# Altium PCB PCB uC Slave Switch.PcbDoc
Units mm, origin at the board's own origin, x right, y up, seen from the top; angles counter-clockwise.
Board outline 88.6 x 48.6 mm, 2 copper layers (Top Layer, Bottom Layer), stack 1.671 mm thick; 26 components, 42 nets, 154 pads, 15 vias.
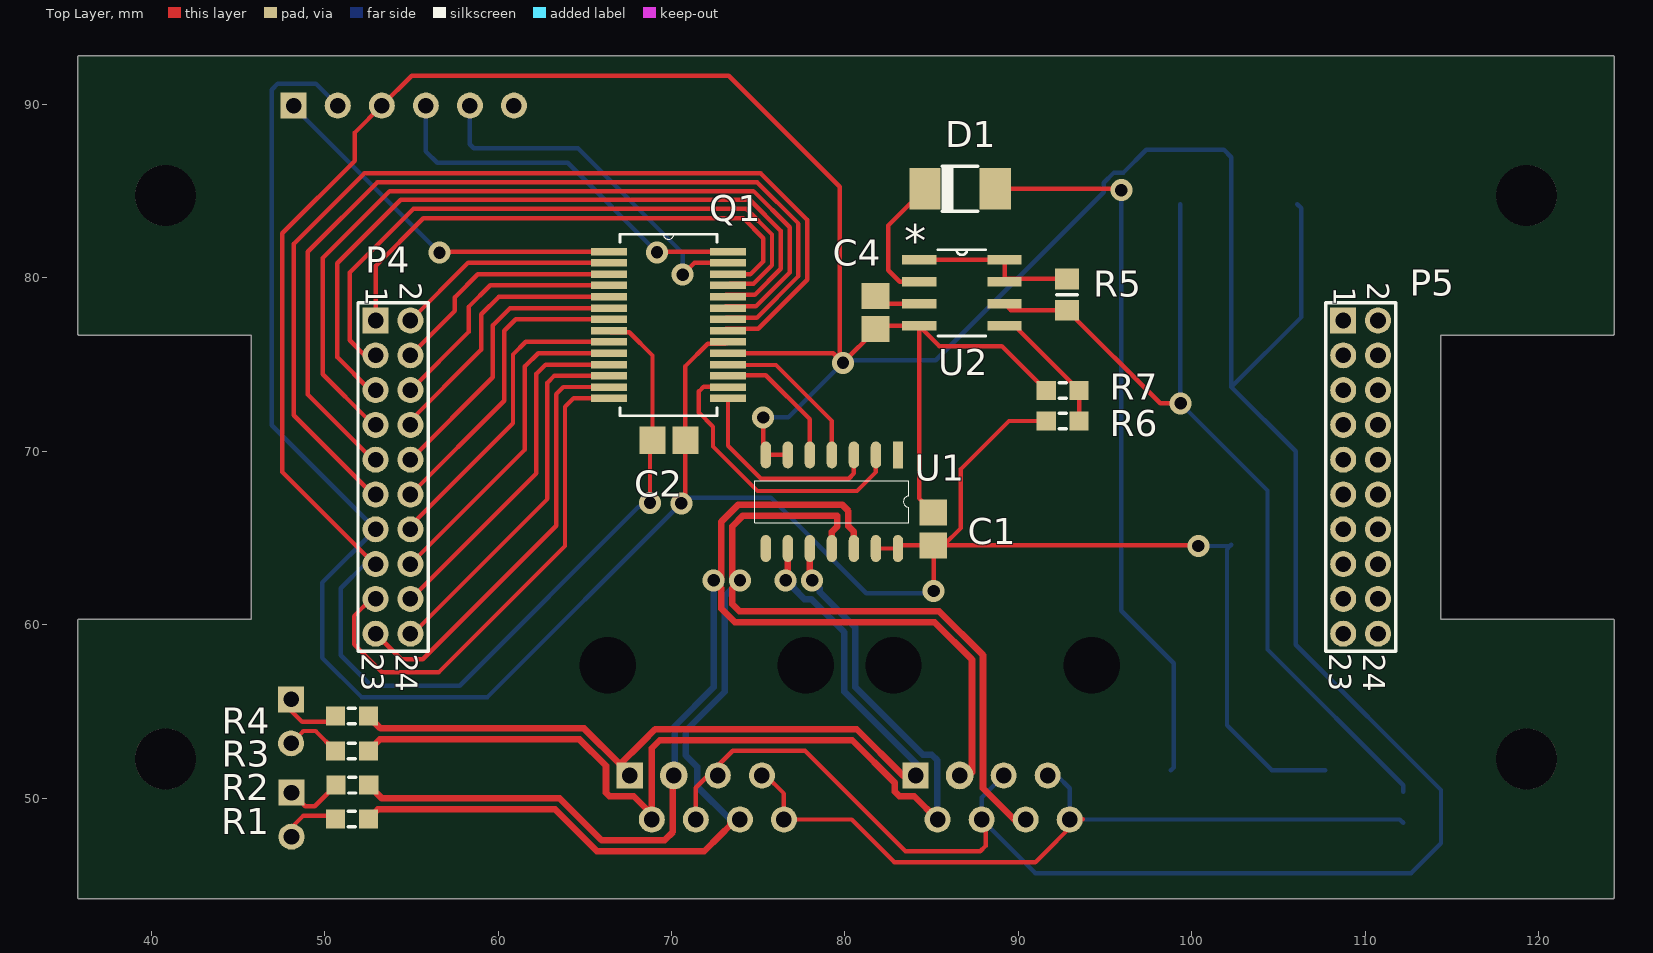
[diagram p0: Top Layer view]
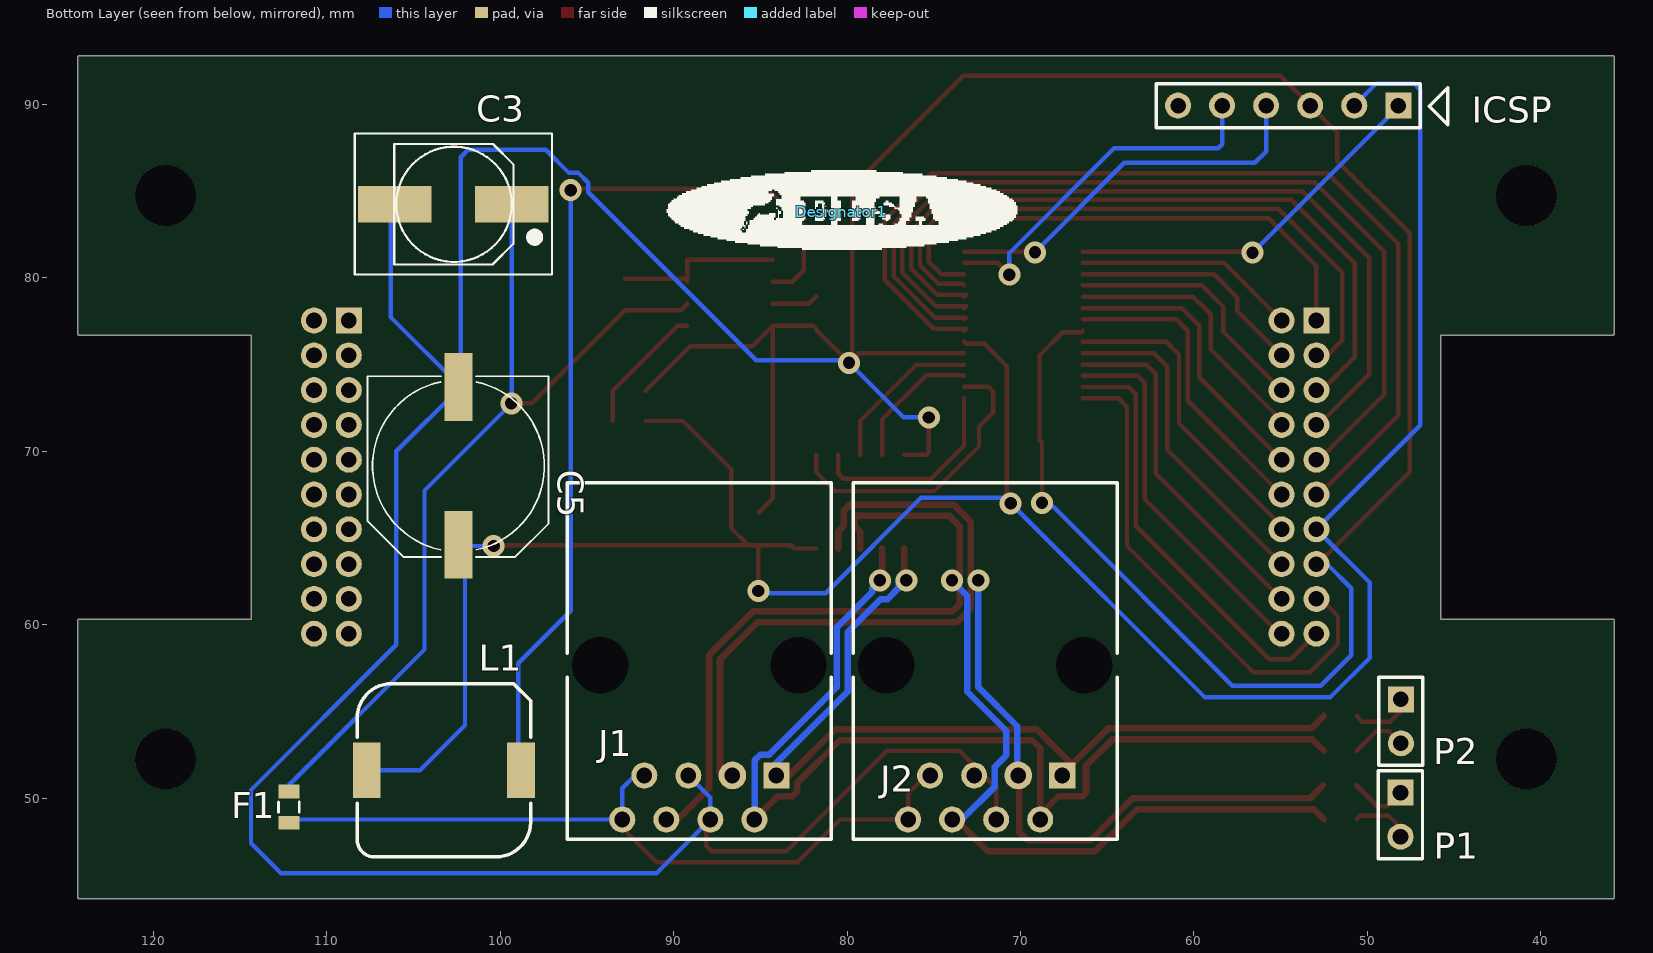
[diagram p1: Bottom Layer view, seen from below]
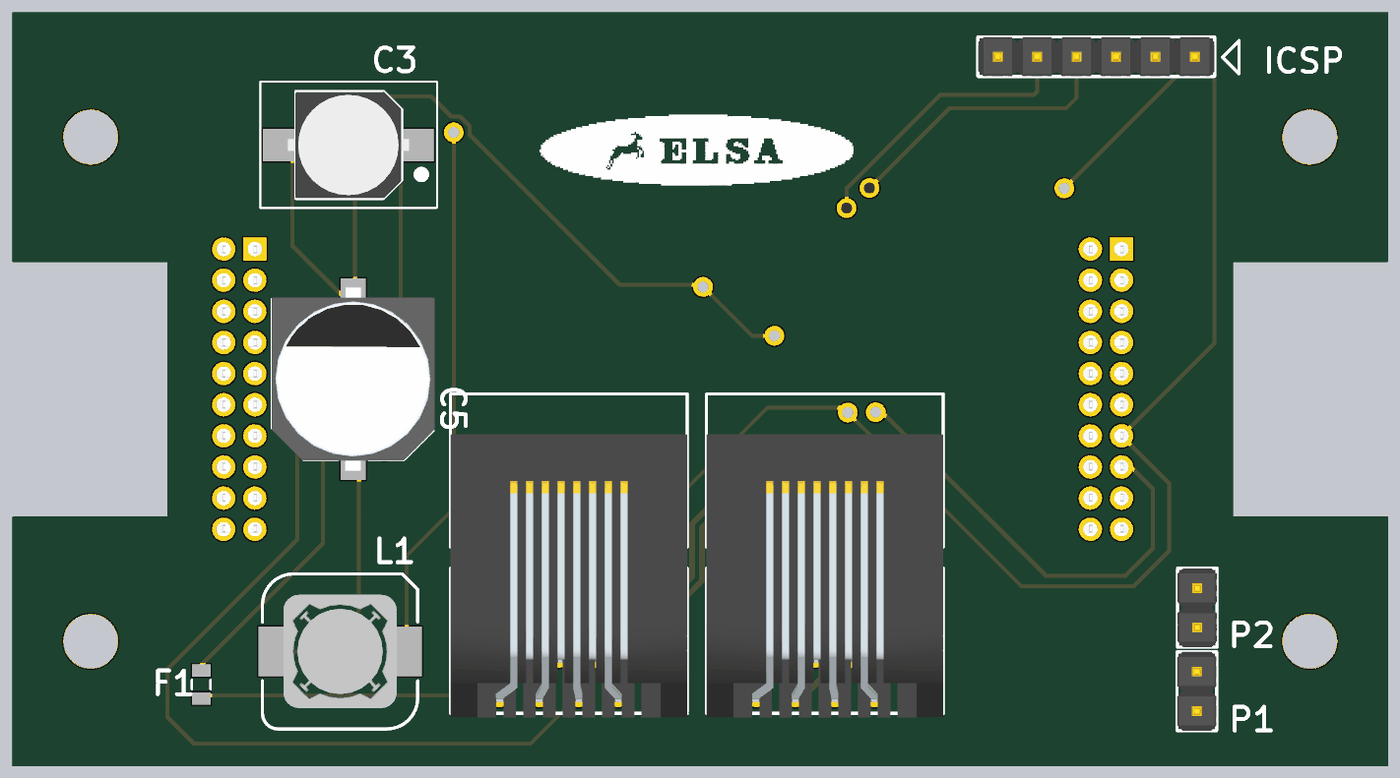
[diagram p2: 3D render of the assembled board from below, using the file's embedded part models]

## Layer stack, top to bottom
Top Solder: solder mask 0.0102, Solder Resist, Dk 3.5
Top Layer: signal copper 0.0356
Dielectric 1: dielectric 1.6, FR-4, Dk 4.8
Bottom Layer: signal copper 0.0356
Bottom Solder: solder mask 0.0102, Solder Resist, Dk 3.5

## Board outline
35.775,44.225 cw(c35.811,44.261) 35.76,44.261 35.76,60.259 cw(c35.811,60.261) 35.811,60.311 45.76,60.311 45.76,76.71 35.811,76.71 cw(c35.811,76.761) 35.76,76.761 35.76,92.761 cw(c35.811,92.761) 35.811,92.811 124.311,92.811 cw(c124.311,92.761) 124.361,92.761 124.361,76.761 cw(c124.311,76.761) 124.311,76.71 114.361,76.71 114.361,60.311 124.311,60.311 cw(c124.311,60.261) 124.346,60.296 cw(c124.311,60.261) 124.361,60.261 124.361,44.261 cw(c124.311,44.261) 124.311,44.21 35.811,44.21 cw(c35.811,44.261)

## Design rules (kind name [scope] priority, off if disabled: settings)
Clearance Clearance_1 [InComponent('Q1')] p1: gap=0.2
Clearance [All] p2: gap=0.254
DiffPairsRouting [All] p1: maxlimit=0.254 minlimit=0.254 mostfreqgap=0.254 toplayer_minwidth=0.381 toplayer_maxwidth=0.381 toplayer_prefwidth=0.381 bottomlayer_minwidth=0.381 bottomlayer_maxwidth=0.381 bottomlayer_prefwidth=0.381 maxuncoupledlength=12.7
PolygonConnect [All] p1: connectstyle=Relief reliefconductorwidth=0.254 reliefentries=4 polygonreliefangle="90 Angle" airgapwidth=0.254
RoutingVias [All] p1: holewidth=0.711 width=1.27 viastyle="Through Hole" minholewidth=0.711 minwidth=1.27 maxholewidth=0.711 maxwidth=1.27
SolderMaskExpansion [All] p1: expansion=0.102
Width [All] p1: maxlimit=0.254 minlimit=0.254 preferedwidth=0.254
29 further rules are at their usual default settings.

## Classes and differential pairs
differential pair TX: +TX_P -TX_N
differential pair RX: +RX_P -RX_N

## Components (designator, comment, footprint, x,y, rotation, side; value= is the part's Value field where it differs from the comment)
C1 "Cap Semi" CAPC2012M 85.09,65.532 r270 top
C2 "Cap Semi" CAPC2012M 69.85,70.637 r0 top
C3 "EDK107M050A9MAA" CAPAE830X1020N 102.718,84.252 r0 bottom
C4 "Cap Pol3" CAPC2012M 81.763,78.003 r270 top
C5 "EDK107M050A9MAA" CAPAE1030X1200_EEE-FC1C471AP(PRIMARY) 102.413,69.164 r270 bottom
D1 "IN5819" DO-214AC_SS14(Primary) 86.639,85.141 r0 top
Designator1 "Comment" ElsaLogoTop 80.34,83.82 r180 bottom
F1 "resettable fuse 1.1A" 0805 112.192,49.479 r270 bottom
ICSP "ICSP Header" HDR1X6 48.209,89.941 r0 bottom (schematic designator P3)
J1 "15-43-6233" 15-43-6233 88.519,68.199 r0 bottom locked
J2 "15-43-6233" 15-43-6233 72.034,68.199 r0 bottom locked
L1 "220uH" CDRH104R 103.251,51.613 r270 bottom
P1 "Header 2" HDR1X2 48.082,50.317 r270 bottom
P2 "Header 2" HDR1X2 48.057,55.702 r270 bottom
P4 "Header 10x2" "HDR2X10 pitch 2mm hole" 52.934,77.546 r270 top
P5 "Header 10x2" "HDR2X10 pitch 2mm hole" 108.737,77.546 r270 top
Q1 "PIC16F18855" SOP65P780X200-28N 69.825,77.292 r0 top
R1 "Res1" RESC1608M 51.562,48.793 r0 top
R2 "Res1" RESC1608M 51.587,50.749 r0 top
R3 "Res1" RESC1608M 51.562,52.73 r0 top
R4 "Res1" RESC1608M 51.562,54.737 r0 top
R5 "Res1" 6-0805_N 92.812,79.045 r270 top
R6 "Res1" RESC1608M 92.558,71.755 r180 top
R7 "Res1" RESC1608M 92.558,73.508 r0 top
U1 "SN65HVD1792D" R-PDSO-G14 83.058,69.799 r270 top
U2 "MC34063ADG" SOIC127P600X175-8N 86.741,79.146 r0 top

## Footprints (in the part's own frame and the unit in brackets; to place one, negate y for a bottom-side part, rotate by r counter-clockwise, add the part's x,y. Pads: shape width x height; smd on the part's side, far side on the other; paste and mask are expansions set on the pad)
6-0805_N [mm] "Chip Resistor, Body 2.0x1.2mm, IPC Medium Density"
  rect 1.2x1.4 smd: 1(-0.9,0) 2(0.9,0)
  silkscreen extent 0,-0.6 0,0.6, body extent -1.07,-0.7 1.07,0.7, height 0.7
15-43-6233 [mm] "Connector; PCB Jack, Thru-Hole; 1-Port; Unshielded without Lightpipes; Right Angle"
  rect 1.5x1.5 hole 0.9: 1(-4.445,16.89)
  round 1.5 hole 0.9: 2(-3.175,19.43) 4(-0.635,19.43) 5(0.635,16.89) 6(1.905,19.43) 7(3.175,16.89) 8(4.445,19.43)
  round 1.6 hole 0.9: 3(-1.905,16.89)
  round 2.95 hole 3.25 unplated: MH1(-5.715,10.54) MH2(5.715,10.54)
  silkscreen extent -7.62,0 7.62,20.58, body extent -7.62,2.59 7.62,20.85, height 12.65
0805 [mm]
  rect 0.8x1.2 smd: 1(-0.9,0) 2(0.9,0)
  silkscreen extent -0.3,-0.6 0.3,0.6
CAPAE830X1020N [mm]
  rect 4.25x2.1 smd: NEG(3.375,0) POS(-3.375,0)
  silkscreen extent -5.7,-4.08 5.68,4.05, body extent -3.9,-3.4 3.9,3.4, height 8.05
CAPAE1030X1200_EEE-FC1C471AP(PRIMARY) [mm]
  rect 3.9x1.6 smd: NEG(-4.55,0) POS(4.55,0)
  silkscreen extent -5.18,-5.25 5.25,5.2, body extent -5.9,-5.25 5.9,5.25, height 10.5
CAPC2012M [mm] "Chip Capacitor, Body 2.0x1.3mm, IPC Low Density"
  rect 1.5x1.6 smd: 1(-0.95,0) 2(0.95,0)
  body extent -1.1,-0.72 1.1,0.72, height 1.1
CDRH104R [mm]
  rect 3.2x1.6 smd: 1(0,4.45) 2(0,-4.45)
  silkscreen extent -5,-5 5,5, body extent -3.65,-3.65 3.65,3.65
DO-214AC_SS14(Primary) [mm]
  rect 1.8x2.4 smd: A(2.025,0) C(-2.025,0)
  silkscreen extent -1.07,-1.3 1.02,1.3, body extent -2.74,-1.4 2.74,1.4, height 2.26
ElsaLogoTop [mm] "Elsa Company logo @ Top Overlay"
  silkscreen extent -10.07,-2.19 10.17,2.39
HDR1X2 [mm] "Connector; Header; 2 Position"
  rect 1.5x1.5 hole 0.9: 1(0,0)
  round 1.5 hole 0.9: 2(2.54,0)
  silkscreen extent -1.27,-1.27 3.81,1.27, body extent -1.27,-1.27 3.81,1.27, height 9.5
HDR1X6 [mm] "Connector; Header; 6 Position"
  rect 1.5x1.5 hole 0.9: 1(0,0)
  round 1.5 hole 0.9: 2(2.54,0) 3(5.08,0) 4(7.62,0) 5(10.16,0) 6(12.7,0)
  silkscreen extent -1.27,-1.27 13.97,1.27, body extent -1.27,-1.27 13.97,1.27, height 9.5
"HDR2X10 pitch 2mm hole" [mm] "Connector; Header; 14x2 Position"
  rect 1.5x1.5 hole 0.9: 1(0,0)
  round 1.5 hole 0.9: 2(0,2.007) 3(2.007,0) 4(2.007,2.007) 5(4.013,0) 6(4.013,2.007) 7(6.02,0) 8(6.02,2.007) 9(8.026,0) 10(8.026,2.007) 11(10.033,0) 12(10.033,2.007) 13(12.04,0) 14(12.04,2.007) 15(14.046,0) 16(14.046,2.007) 17(16.053,0) 18(16.053,2.007) 19(18.059,0) 20(18.059,2.007)
  silkscreen extent -1.02,-1.02 19.08,3.02, body extent -1.22,-1.25 19.28,3.25, height 4
R-PDSO-G14 [mm]
  rect 1.55x0.6 smd: 1(0,0)
  oval 1.55x0.6 smd: 2(0,-1.27) 3(0,-2.54) 4(0,-3.81) 5(0,-5.08) 6(0,-6.35) 7(0,-7.62) 8(5.4,-7.62) 9(5.4,-6.35) 10(5.4,-5.08) 11(5.4,-3.81) 12(5.4,-2.54) 13(5.4,-1.27) 14(5.4,0)
  silkscreen extent 1.48,-8.25 3.92,0.64, body extent -0.27,-8.17 5.73,0.58, height 1.75
RESC1608M [mm] "Chip Resistor, Body 1.6x0.8mm, IPC Low Density"
  rect 1.1x1.1 smd: 1(-0.95,0) 2(0.95,0)
  silkscreen extent -0.2,-0.45 0.2,0.45, body extent -0.85,-0.48 0.85,0.48, height 0.6
SOIC127P600X175-8N [mil]
  rect 78x22 smd: 1(-97,75) 2(-97,25) 3(-97,-25) 4(-97,-75) 5(97,-75) 6(97,-25) 7(97,25) 8(97,75)
  silkscreen extent -54,-98 54,98, body extent -122,-98 122,98, height 69
SOP65P780X200-28N [mil]
  rect 81x17 smd: 1(-135,166) 2(-135,141) 3(-135,115) 4(-135,90) 5(-135,64) 6(-135,38) 7(-135,13) 8(-135,-13) 9(-135,-38) 10(-135,-64) 11(-135,-90) 12(-135,-115) 13(-135,-141) 14(-135,-166) 15(135,-166) 16(135,-141) 17(135,-115) 18(135,-90) 19(135,-64) 20(135,-38) 21(135,-13) 22(135,13) 23(135,38) 24(135,64) 25(135,90) 26(135,115) 27(135,141) 28(135,166)
  silkscreen extent -110,-206 110,207, body extent -154,-201 154,201, height 75

## Part data
C1 C2: "Capacitor (Semiconductor SIM Model)"
C3 C5: "Cap, Alu Elec, 100uf, 50v, Smd"
C4: "Polarized Capacitor (Surface Mount)"
D1: library part SS14, "1a 40v Smd Schottky Rectifier"
F1: library part "resettable fuse 1.1A 0805", "resettable fuse 1.1A 0805"
ICSP: library part "Header 6", "Header, 6-Pin"
J1 J2: "Right Angle, Standard Profile, RJ45-Keyed, Flange Mount PCB Jack"
L1: library part CDRH104R, "Inductor Power Shielded Drum Core 220uH"
P1 P2: "Header, 2-Pin"
P4 P5: "Header, 14-Pin, Dual row"
Q1: "PIC16F18855-SSOP 28 pin"
R1 R2 R3 R4 R5 R6 R7: "Resistor"
U2: "MC34063A Series 40V 1.5A 100kHz Step-Up/Down/Inverting Switching Regulator-SOIC8"

## Free pads (board coordinates)
  round 3.5 hole 3.5: 0(40.811,52.261) 0(40.811,84.761) 0(119.311,52.261) 0(119.311,84.761)

## Via types
v1: diameter 1.27, hole 0.711, Top Layer to Bottom Layer, 15 vias

## Nets (pads, with @x,y where several pads share a name; then routed paths per layer and width w, separated by ;. In a path a pad name is that pad's centre, name@x,y a point inside that pad or via, vN(x,y) a via of type N, cw(c..) or ccw(c..) an arc to the next point about the centre after c; other vN are vias at no path point)
DE: Q1.18 U1.4 | length 9.3
  Top Layer w0.254: Q1.18 73.279,74.981 76.022,74.981 79.248,71.755 U1.4
GND: C1.1 C2.1 C3.NEG C4.2 C5.NEG ICSP.3 J1.4 J1.5 J2.4 J2.5 P4.15 Q1.8 Q1.19 R7.1 U1.6 U1.7 U2.4 | length 294.7
  Top Layer w0.254: P4.15@52.857,63.5 47.549,68.809 47.549,82.575 51.74,86.766 51.74,88.392 ICSP.3 55.016,91.669 73.304,91.669 79.705,85.268 79.705,75.286 v1(79.883,75.108) 79.324,75.667 Q1.19 ; Q1.8 66.488,76.87 67.56,76.87 68.9,75.53 C2.1 68.758,70.495 v1(68.758,67.031) ; J2.4@70.841,48.769 71.399,49.328 71.399,50.598 73.532,52.73 77.699,52.73 83.49,46.939 87.808,46.939 88.113,47.244 88.113,48.464 J1.4@88.417,48.769 ; v1(75.286,71.958) 75.286,69.952 U1.7 U1.6 ; v1@79.908,75.133 81.763,76.987 C4.2 81.951,77.241 U2.4 ; C1.1 84.277,67.295 U2.4 ; R7.1 89.042,76.073 85.446,76.073 U2.4
  Bottom Layer w0.254: P4.15 52.324,63.5 50.927,62.103 50.927,58.242 52.68,56.49 57.785,56.49 68.11,66.815 v1@68.974,66.815 ; v1@68.605,66.878 v1(68.758,67.031) ; v1(75.286,71.958) 76.733,71.958 v1(79.883,75.108) 80.035,75.26 85.242,75.26 94.92,84.938 94.92,85.485 95.515,86.081 96.063,86.081 97.384,87.401 101.854,87.401 102.286,86.97 C5.NEG@102.286,73.714 ; J1.5@89.687,51.309 J1.5 87.884,50.039 J1.4 90.984,45.669 112.649,45.669 114.376,47.396 114.376,50.47 105.994,58.852 105.994,70.006 C5.NEG@102.286,73.714 ; C3.NEG 106.324,84.02 106.324,77.753 C5.NEG@102.286,73.714
ICSPCLK: ICSP.5 Q1.27 | length 21.3
  Top Layer w0.254: v1(70.637,80.188) 71.323,80.874 Q1.27
  Bottom Layer w0.254: ICSP.5 58.369,87.706 58.598,87.478 64.607,87.478 70.637,81.447 v1(70.637,80.188)
ICSPDAT: ICSP.4 Q1.28 | length 22.5
  Top Layer w0.254: v1(69.164,81.483) 69.19,81.509 Q1.28
  Bottom Layer w0.254: ICSP.4 55.829,87.3 56.49,86.639 64.008,86.639 v1(69.164,81.483)
M\C\L\R\: ICSP.1 Q1.1 | length 22
  Top Layer w0.254: v1(56.617,81.458) 56.667,81.509 Q1.1
  Bottom Layer w0.254: ICSP.1 48.082,89.814 48.26,89.814 v1(56.617,81.458)
NetC4_1: C4.1 U2.3 | length 2.7
  Top Layer w0.254: C4.1 82.205,78.511 U2.3
NetD1_A: D1.A L1.1 | length 42.1
  Top Layer w0.254: D1.A 95.86,85.141 v1(95.936,85.065)
  Bottom Layer w0.254: v1(95.936,85.065) 95.936,60.808 98.958,57.785 98.958,51.77 L1.1
NetD1_C: D1.C U2.2 | length 7.6
  Top Layer w0.254: U2.2 83.16,79.781 82.499,80.442 82.499,83.026 D1.C
NetF1_2: F1.2 J1.7 J1.8 J2.7 J2.8 | length 45.2
  Top Layer w0.254: J2.7@74.651,51.309 75.437,51.309 76.479,50.267 J2.8 80.39,48.769 82.855,46.304 90.983,46.304 93.472,48.793 93.726,48.793
  Bottom Layer w0.254: J1.7@92.227,51.309 92.964,50.572 J1.8 112.002,48.769 F1.2
NetP1_1: P1.1 R2.1 | length 3.4
  Top Layer w0.254: P1.1 48.87,49.53 49.418,49.53 R2.1
NetP1_2: P1.2 R1.1 | length 3.4
  Top Layer w0.254: P1.2 48.082,48.311 48.768,48.997 50.409,48.997 R1.1
NetP2_1: P2.1 R4.1 | length 3.6
  Top Layer w0.254: P2.1 48.057,55.042 48.692,54.407 50.282,54.407 R4.1
NetP2_2: P2.2 R3.1 | length 3.3
  Top Layer w0.254: P2.2 48.768,53.873 49.469,53.873 R3.1
NetR5_1: R5.1 U2.1 U2.7 U2.8 | length 9.9
  Top Layer w0.254: U2.1 U2.8 U2.7 89.368,79.945 R5.1
NetR6_1: R6.1 R7.2 U2.5 | length 7.6
  Top Layer w0.254: U2.5 89.774,77.241 R7.2 R6.1
RA0: P4.2 Q1.2 | length 12.8
  Top Layer w0.254: P4.2 58.268,80.874 Q1.2
RA1: P4.4 Q1.3 | length 13.9
  Top Layer w0.254: P4.4 57.506,78.105 57.506,78.892 58.826,80.213 Q1.3
RA2: P4.6 Q1.4 | length 14.8
  Top Layer w0.254: P4.6 58.293,76.886 58.293,78.334 59.538,79.578 Q1.4
RA3: P4.8 Q1.5 | length 16
  Top Layer w0.254: P4.8@54.686,71.526 59.03,75.87 59.03,77.902 60.046,78.918 Q1.5
RA4: P4.10 Q1.6 | length 16.8
  Top Layer w0.254: P4.10 59.69,74.27 59.69,77.267 60.681,78.257 Q1.6
RA5: P4.12 Q1.7 | length 18
  Top Layer w0.254: P4.12 60.35,72.923 60.35,76.962 61.011,77.622 Q1.7
RA6: P4.16 Q1.10 | length 19.3
  Top Layer w0.254: P4.16 61.544,70.104 61.544,74.905 62.306,75.667 Q1.10
RA7: P4.14 Q1.9 | length 18.4
  Top Layer w0.254: P4.14 54.94,65.71 60.858,71.628 60.858,75.59 61.595,76.327 Q1.9
RB0: P4.11 Q1.21 | length 58.3
  Top Layer w0.254: P4.11@52.934,67.793 52.502,67.793 48.209,72.085 48.209,81.966 52.273,86.03 75.144,86.03 77.826,83.348 77.826,79.898 75.007,77.08 73.136,77.08 Q1.21
RB1: P4.9 Q1.22 | length 52.9
  Top Layer w0.254: P4.9@52.934,69.647 52.654,69.647 49.022,73.279 49.022,81.509 53.035,85.522 74.933,85.522 77.318,83.138 77.318,80.108 74.924,77.715 73.161,77.715 Q1.22
RB2: P4.7 Q1.23 | length 47.5
  Top Layer w0.254: P4.7@52.934,71.78 52.553,71.78 49.886,74.447 49.886,81.153 53.746,85.014 74.723,85.014 76.81,82.927 76.81,80.319 74.866,78.375 73.136,78.375 Q1.23
RB3: P4.5 Q1.24 | length 42.4
  Top Layer w0.254: P4.5 52.629,73.533 50.724,75.438 50.724,80.848 54.381,84.506 74.513,84.506 76.302,82.717 76.302,80.529 74.808,79.035 73.136,79.035 Q1.24
RB4: P4.3 Q1.25 | length 37.4
  Top Layer w0.254: P4.3@53.238,75.54 52.299,75.54 51.435,76.403 51.435,80.315 55.118,83.998 74.302,83.998 75.794,82.506 75.794,80.739 74.725,79.67 73.346,79.67 Q1.25
RB5: P4.1 Q1.26 | length 30.8
  Top Layer w0.254: P4.1 52.934,80.696 55.677,83.439 74.143,83.439 75.286,82.296 75.286,80.95 74.549,80.213 Q1.26
RC0: P4.18 Q1.11 | length 20.4
  Top Layer w0.254: P4.18@54.94,61.468 62.205,68.732 62.205,74.473 62.738,75.006 Q1.11
RC1: P4.20 Q1.12 | length 21.6
  Top Layer w0.254: P4.20@54.94,59.36 62.84,67.259 62.84,73.965 63.246,74.371 Q1.12
RC2: P4.19 Q1.13 | length 25
  Top Layer w0.254: P4.19 54.407,58.014 55.651,58.014 63.348,65.71 63.348,73.304 63.754,73.711 Q1.13
RC3: P4.17 Q1.14 | length 29.9
  Top Layer w0.254: P4.17 52.68,61.493 51.689,60.503 51.689,58.877 53.315,57.252 56.566,57.252 63.856,64.541 63.856,72.568 64.364,73.076 Q1.14
RE: Q1.15 U1.3 | length 12
  Top Layer w0.254: Q1.15 73.254,70.333 75.159,68.428 80.213,68.428 80.518,68.732 U1.3
RX: Q1.16 U1.2 | length 17.2
  Top Layer w0.254: Q1.16 73.228,73.736 71.857,73.736 71.577,73.457 71.577,72.238 72.39,71.425 72.39,70.282 74.955,67.716 80.696,67.716 81.788,68.809 U1.2
RX_N: J1.2 J2.2 R3.2 U1.10 | length 61.7
  Top Layer w0.381: R3.2 53.172,53.391 64.694,53.391 66.218,51.867 66.218,50.317 66.421,50.114 67.818,50.114 68.859,49.073 68.859,52.883 69.317,53.34 80.416,53.34 82.88,50.877 82.88,50.375 83.14,50.114 83.998,50.114 J1.2 J1.2@85.877,48.769 ; U1.10 77.978,62.687 v1(78.105,62.56)
  Bottom Layer w0.381: v1(78.105,62.56) 78.549,62.116 78.549,61.887 80.594,59.842 80.594,56.413 82.728,54.28 84.504,52.503 85.008,52.503 85.035,52.476 85.039,52.476 85.319,52.197 85.319,49.328 J1.2@85.877,48.769
RX_P: J1.1 J2.1 R4.2 U1.9 | length 52.8
  Top Layer w0.381: R4.2 53.223,54.026 64.957,54.026 J2.1@67.031,51.952 ; J2.1@67.031,51.309 J2.1@67.031,51.952 ; v1(76.581,62.56) 76.708,62.687 U1.9 ; J1.1@84.607,51.309 83.345,51.309 80.679,53.975 69.054,53.975 68.296,53.218 J2.1@67.031,51.952
  Bottom Layer w0.381: v1(76.581,62.56) 76.978,62.56 77.025,62.513 77.025,62.113 77.658,61.481 78.058,61.481 79.959,59.579 79.959,56.15 84.607,51.502 J1.1@84.607,51.309
TX: Q1.17 U1.5 | length 7.8
  Top Layer w0.254: Q1.17 73.279,74.397 75.438,74.397 77.978,71.857 U1.5
TX_N: J1.6 J2.6 R1.2 U1.11 | length 79.7
  Top Layer w0.381: R1.2 53.054,49.335 53.071,49.352 63.288,49.352 65.701,46.939 71.891,46.939 72.821,47.869 72.821,47.878 73.381,48.438 J2.6@73.381,48.769 ; U1.11 79.248,65.365 79.566,65.682 79.566,66.294 74.117,66.294 73.508,65.684 73.508,62.636 73.584,62.56 v1(73.952,62.56) 73.508,62.116 73.508,61.189 73.914,60.782 85.429,60.782 87.96,58.252 87.96,50.572 89.763,48.769 J1.6@90.957,48.769
  Bottom Layer w0.381: J2.6@73.381,48.769 71.475,50.675 71.475,51.808 70.815,52.467 70.815,53.89 73.063,56.138 73.063,61.669 73.952,62.558 v1(73.952,62.56)
TX_P: J1.3 J2.3 R2.2 U1.12 | length 73.1
  Top Layer w0.381: R2.2 53.299,49.987 63.551,49.987 65.964,47.574 69.24,47.574 69.596,47.574 70.079,48.057 70.079,51.309 J2.3@70.255,51.309 ; U1.12 80.518,65.365 80.2,65.682 80.2,66.557 79.829,66.929 73.854,66.929 72.873,65.947 72.873,62.636 72.796,62.56 v1(72.428,62.56) 72.873,62.116 72.873,60.926 73.651,60.147 85.166,60.147 87.325,57.989 87.325,51.486 J1.3@87.147,51.309
  Bottom Layer w0.381: J2.3@69.571,51.309 70.18,51.919 70.18,54.153 72.428,56.401 v1(72.428,62.56)
VCC: C1.2 C2.2 C5.POS ICSP.2 L1.2 P4.13 Q1.20 R6.2 U1.13 U1.14 | length 146.6
  Top Layer w0.254: v1(70.561,67.005) 70.8,67.244 C2.2 70.8,74.92 72.089,76.209 73.136,76.209 Q1.20 ; U1.13 U1.14 83.241,64.582 C1.2 ; v1(85.115,61.951) 85.115,64.557 C1.2 ; R6.2 89.459,71.755 86.69,68.986 86.69,65.583 C1.2@85.689,64.582 ; v1(100.381,64.541) 100.34,64.582 C1.2@85.689,64.582 ; C1.2 C1.2@85.689,64.582
  Bottom Layer w0.254: ICSP.2 49.479,91.211 47.295,91.211 46.939,90.856 46.939,71.501 P4.13 49.86,62.433 49.86,58.09 52.121,55.829 59.385,55.829 v1(70.561,67.005) 70.891,67.335 75.717,67.335 81.229,61.824 84.988,61.824 v1(85.115,61.951) ; v1(100.381,64.541) C5.POS@102.213,64.541 ; C5.POS@102.286,64.614 C5.POS@102.213,64.541 ; L1.2 104.623,51.613 102.032,54.204 102.032,64.36 C5.POS@102.213,64.541
VIN: C3.POS F1.1 R5.2 U2.6 | length 51.7
  Top Layer w0.254: U2.6 89.571,78.145 R5.2 98.185,72.771 v1(99.365,72.771)
  Bottom Layer w0.254: v1@99.343,72.771 C3.POS ; v1@99.352,72.758 104.369,67.742 104.369,58.572 112.192,50.749 F1.1
pads on no net: ICSP.6 J1.MH1 J1.MH2 J2.MH1 J2.MH2 P5.1 P5.2 P5.3 P5.4 P5.5 P5.6 P5.7 P5.8 P5.9 P5.10 P5.11 P5.12 P5.13 P5.14 P5.15 P5.16 P5.17 P5.18 P5.19 P5.20 U1.1 U1.8

## Keep-outs
Keep-Out Layer:
  text "PCB pengolah data slave switch" at 37.617,94.666 h1.52

## Silkscreen, mask and mechanical layers (free items; w line width, h text height)
Bottom Overlay:
  lines w0.2: 45.364,88.849 46.431,89.916 45.364,90.983 45.364,88.849
Mechanical 1:
  lines w0.05: 45.441,74.066 45.466,74.092
  lines w0.1: 35.811,44.261 124.311,44.261 124.311,60.261 124.311,60.261 114.311,60.261 114.311,76.761 124.311,76.761 124.311,92.761 35.811,92.761 35.811,76.761 45.811,76.761 45.811,60.261 35.811,60.261 ; 35.811,44.261 35.811,44.261 ; 35.811,44.261 35.811,60.261 ; 35.811,60.261 35.811,60.261

## Text inside footprints (layer, text, board x,y; h text height)
P4: Top Overlay "24" at 54.084,58.321 h1.27 r270; Top Overlay "23" at 52.134,58.371 h1.27 r270; Top Overlay "1" at 52.375,79.502 h1.27 r270; Top Overlay "2" at 54.331,79.756 h1.27 r270
P5: Top Overlay "2" at 110.134,79.756 h1.27 r270; Top Overlay "1" at 108.179,79.502 h1.27 r270; Top Overlay "23" at 107.937,58.371 h1.27 r270; Top Overlay "24" at 109.887,58.321 h1.27 r270
Q1: Mechanical 1 "*" at 65.551,81.57 h1.88; Mechanical 1 "*" at 65.55,81.571 h1.88; Mechanical 1 "*" at 65.553,81.568 h1.88; Mechanical 1 "*" at 65.555,81.566 h1.88; Mechanical 1 "*" at 65.557,81.564 h1.88; Mechanical 1 "*" at 65.551,81.57 h1.88
U2: Mechanical 1 "*" at 83.434,81.237 h1.88; Top Overlay "*" at 83.434,81.237 h1.88